# Altium PCB 主板-双BH(1).PcbDoc (part 4 of 13)
Units mm, origin at the board's own origin, x right, y up, seen from the top; angles counter-clockwise.
Board outline 97.69 x 103.45 mm, 2 copper layers (Top Layer, Bottom Layer); 78 components, 75 nets, 243 pads, 279 vias.
Unrouted connection lines stored in the file: 7.
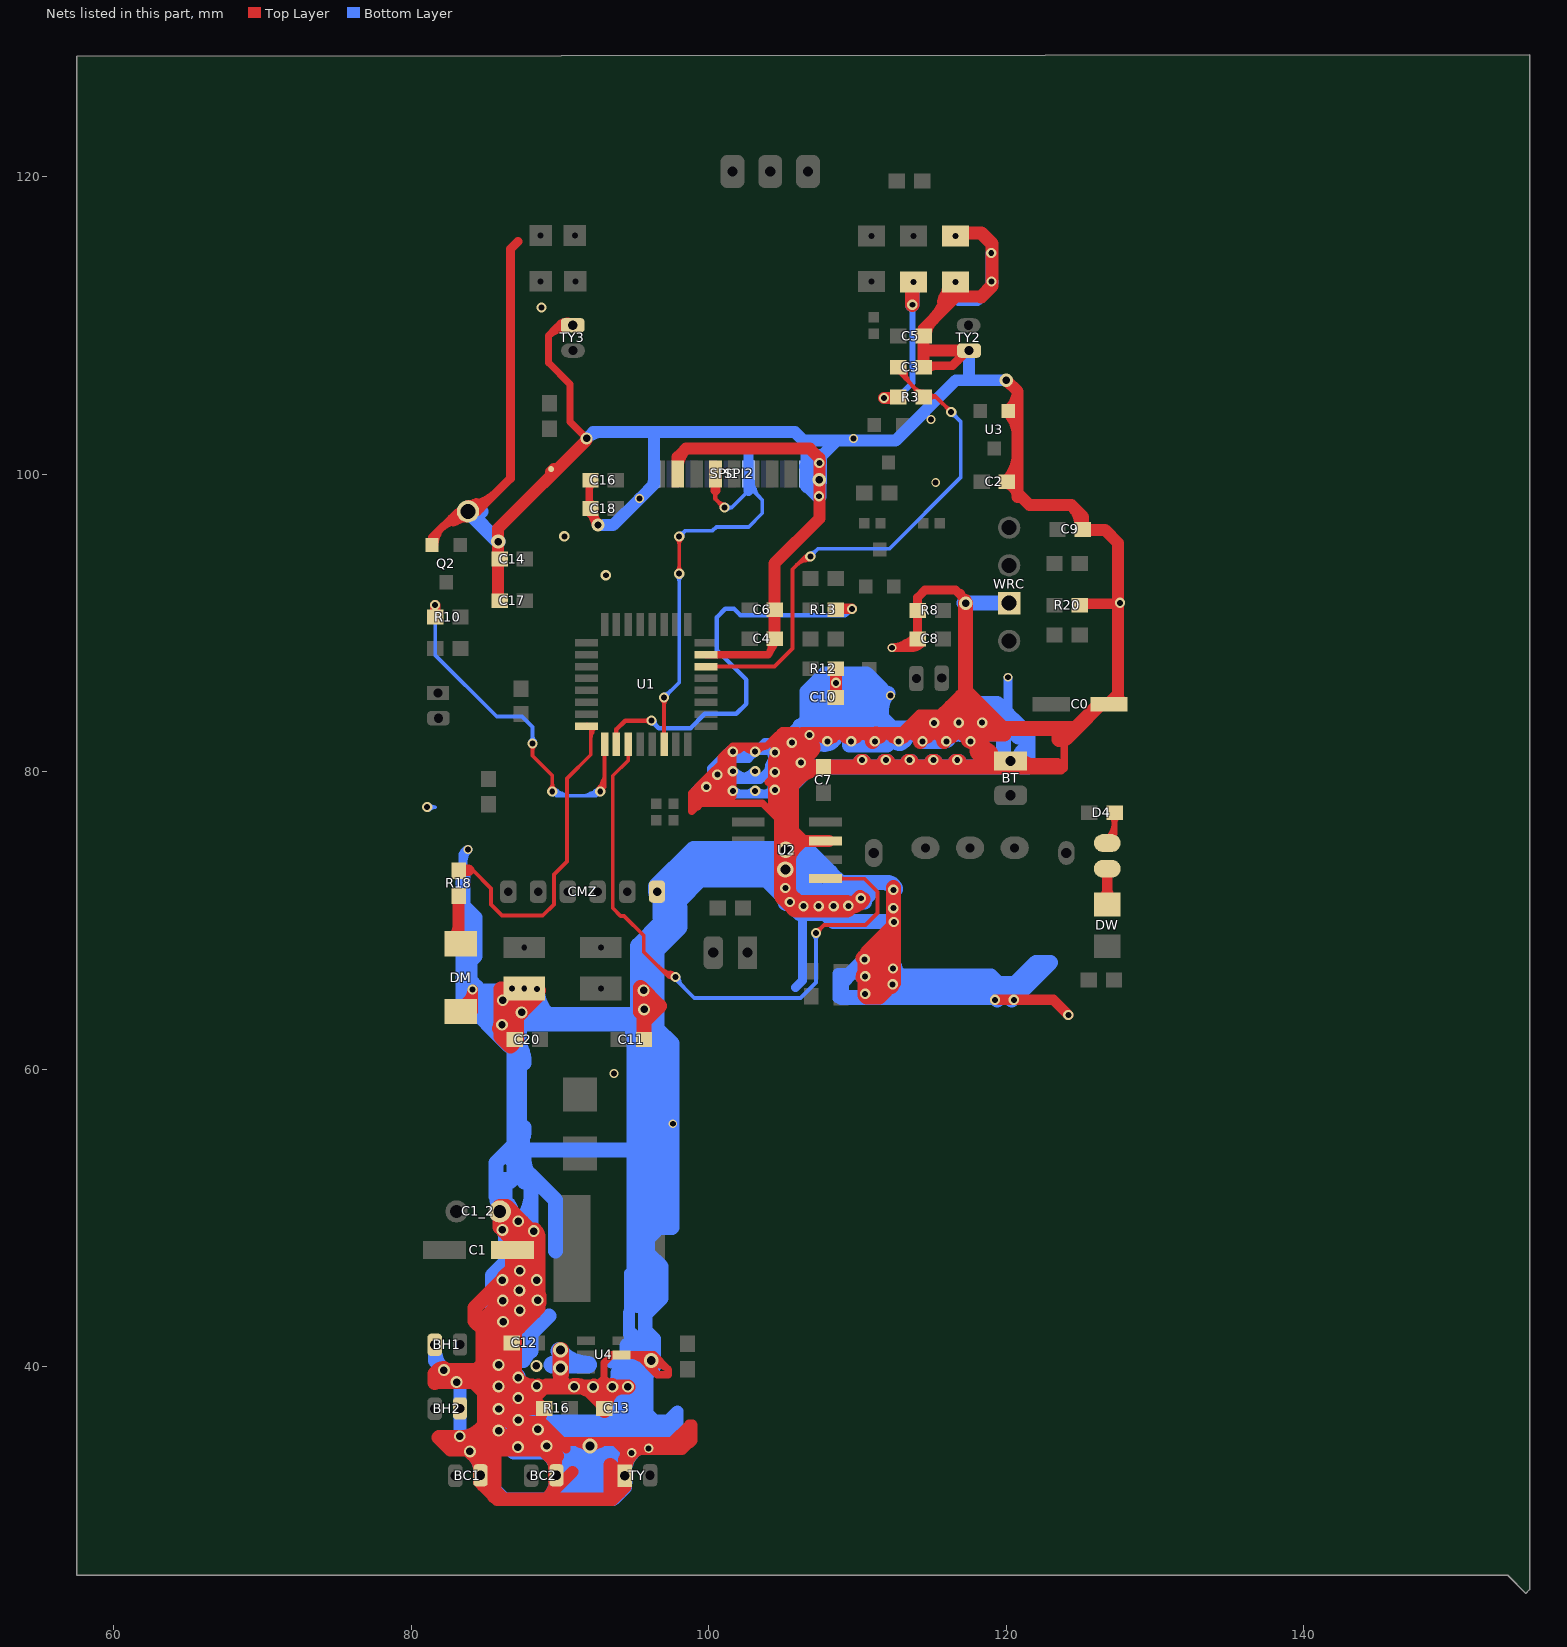
[diagram p4: the nets of this part, all layers, seen from the top]

## Via types
v1: diameter 0.7, hole 0.4, Top Layer to Bottom Layer, 108 vias
v2: diameter 0.68, hole 0.4, Top Layer to Bottom Layer, 87 vias
v3: diameter 0.8, hole 0.5, Top Layer to Bottom Layer, tented both sides, 33 vias
v4: diameter 0.6, hole 0.4, Top Layer to Bottom Layer, 12 vias
v5: diameter 0.9, hole 0.5, Top Layer to Bottom Layer, 8 vias
v6: diameter 0.8, hole 0.5, Top Layer to Bottom Layer, 6 vias
v7: diameter 1, hole 0.75, Top Layer to Bottom Layer, tented both sides, 5 vias
v8: diameter 3.4, hole 2.9, Top Layer to Bottom Layer, 4 vias
v9: diameter 1, hole 0.6, Top Layer to Bottom Layer, tented both sides, 3 vias
v10: diameter 1, hole 0.56, Top Layer to Bottom Layer, tented both sides, 2 vias
v11: diameter 1.1, hole 0.68, Top Layer to Bottom Layer, 2 vias
v12: diameter 0.8, hole 0.4, Top Layer to Bottom Layer, 2 vias
v13: diameter 0.65, hole 0.4, Top Layer to Bottom Layer, tented both sides, 2 vias
v14: diameter 1, hole 0.6, Top Layer to Bottom Layer, tented bottom, 1 vias
v15: diameter 0.7, hole 0.4, Top Layer to Bottom Layer, tented bottom, 1 vias
v16: diameter 0.95, hole 0.5, Top Layer to Bottom Layer, 1 vias
v17: diameter 0.64, hole 0.4, Top Layer to Bottom Layer, 1 vias
v18: diameter 0.62, hole 0.4, Top Layer to Bottom Layer, 1 vias

## Nets (pads, with @x,y where several pads share a name; then routed paths per layer and width w, separated by ;. In a path a pad name is that pad's centre, name@x,y a point inside that pad or via, vN(x,y) a via of type N, cw(c..) or ccw(c..) an arc to the next point about the centre after c; other vN are vias at no path point) (continued)
CSN: SPI1.5 SPI2.5 U1.30 | length 61.5
  Top Layer w0.254: U1.30@97,81.853 v2(97,84.988) ; v2(98.019,93.32) v2(98.019,95.809) ; v2@96.849,84.838 cw(c96.486,84.474) 97,84.474 ; v2@96.849,84.838 cw(c96.486,84.474) 97,84.474 ; v2@96.849,84.838 cw(c96.486,84.474) 97,84.474 ; U1.30@96.913,82.464 ccw(c96.703,82.674) 97,82.674 ; U1.30@96.913,82.464 ccw(c96.703,82.674) 97,82.674 ; U1.30@96.913,82.464 ccw(c96.703,82.674) 97,82.674 ; 97,82.674 ccw(c97.297,82.674) U1.30@97.087,82.464 ; 97,82.674 ccw(c97.297,82.674) U1.30@97.087,82.464 ; 97,82.674 ccw(c97.297,82.674) U1.30@97.087,82.464 ; 97,84.474 cw(c97.514,84.474) v2@97.151,84.838 ; 97,84.474 cw(c97.514,84.474) v2@97.151,84.838 ; 97,84.474 cw(c97.514,84.474) v2@97.151,84.838 ; v2@97.868,93.47 ccw(c97.504,93.834) 98.019,93.834 ; v2@97.868,93.47 ccw(c97.504,93.834) 98.019,93.834 ; v2@97.868,93.47 ccw(c97.504,93.834) 98.019,93.834 ; v2@97.868,95.658 cw(c97.504,95.295) 98.019,95.295 ; v2@97.868,95.658 cw(c97.504,95.295) 98.019,95.295 ; v2@97.868,95.658 cw(c97.504,95.295) 98.019,95.295 ; 98.019,93.834 ccw(c98.533,93.834) v2@98.169,93.47 ; 98.019,93.834 ccw(c98.533,93.834) v2@98.169,93.47 ; 98.019,93.834 ccw(c98.533,93.834) v2@98.169,93.47 ; 98.019,95.295 cw(c98.533,95.295) v2@98.169,95.658 ; 98.019,95.295 cw(c98.533,95.295) v2@98.169,95.658 ; 98.019,95.295 cw(c98.533,95.295) v2@98.169,95.658
  Top Layer w0.3: 100.457,98.933 100.457,98.349 v2@101.054,97.752 ; 100.699,98.107 ccw(c101.067,98.475) v2@101.067,97.955 ; 100.699,98.107 ccw(c101.067,98.475) v2@101.067,97.955 ; 100.699,98.107 ccw(c101.067,98.475) v2@101.067,97.955 ; 100.76,98.046 cw(c100.479,97.765) v2@100.877,97.765 ; 100.76,98.046 cw(c100.479,97.765) v2@100.877,97.765 ; 100.76,98.046 cw(c100.479,97.765) v2@100.877,97.765
  Top Layer w0.7: 100.457,98.933 SPI1.5@100.457,100.032
  Bottom Layer w0.254: v2(97,84.988) 98.019,86.007 v2(98.019,93.32) ; v2(98.019,95.809) 98.425,96.215 100.265,96.215 100.519,96.469 102.692,96.469 103.607,97.384 103.607,98.274 SPI2.5@102.68,99.2 ; v2(101.067,97.765) 101.549,97.765 ; 102.68,98.895 101.549,97.765 ; v2@97,85.201 ccw(c97,85.716) 97.364,85.352 ; v2@97,85.201 ccw(c97,85.716) 97.364,85.352 ; v2@97,85.201 ccw(c97,85.716) 97.364,85.352 ; v2@97.213,84.988 cw(c97.727,84.988) 97.364,85.352 ; v2@97.213,84.988 cw(c97.727,84.988) 97.364,85.352 ; v2@97.213,84.988 cw(c97.727,84.988) 97.364,85.352 ; v2@97.868,93.169 cw(c97.504,92.805) 98.019,92.805 ; v2@97.868,93.169 cw(c97.504,92.805) 98.019,92.805 ; v2@97.868,93.169 cw(c97.504,92.805) 98.019,92.805 ; 98.019,92.805 cw(c98.533,92.805) v2@98.169,93.169 ; 98.019,92.805 cw(c98.533,92.805) v2@98.169,93.169 ; 98.019,92.805 cw(c98.533,92.805) v2@98.169,93.169 ; v2@98.019,96.022 ccw(c98.019,96.536) 98.382,96.172 ; v2@98.019,96.022 ccw(c98.019,96.536) 98.382,96.172 ; v2@98.019,96.022 ccw(c98.019,96.536) 98.382,96.172 ; v2@98.232,95.809 cw(c98.746,95.809) 98.382,96.172 ; v2@98.232,95.809 cw(c98.746,95.809) 98.382,96.172 ; v2@98.232,95.809 cw(c98.746,95.809) 98.382,96.172 ; v2@101.224,97.621 cw(c101.549,97.324) 101.549,97.765 ; v2@101.224,97.621 cw(c101.549,97.324) 101.549,97.765 ; v2@101.224,97.621 cw(c101.549,97.324) 101.549,97.765 ; v2@101.224,97.908 ccw(c101.549,98.205) 101.549,97.765 ; v2@101.224,97.908 ccw(c101.549,98.205) 101.549,97.765 ; v2@101.224,97.908 ccw(c101.549,98.205) 101.549,97.765 ; SPI2.5@102.605,99.268 cw(c102.51,98.905) 102.873,99.002 ; SPI2.5@102.605,99.268 cw(c102.51,98.905) 102.873,99.002 ; SPI2.5@102.605,99.268 cw(c102.51,98.905) 102.873,99.002 ; SPI2.5@102.658,99.518 cw(c102.138,98.594) 103.162,98.869 ; SPI2.5@102.658,99.518 cw(c102.138,98.594) 103.162,98.869 ; SPI2.5@102.658,99.518 cw(c102.138,98.594) 103.162,98.869 ; SPI2.5@102.724,99.557 ccw(c103.691,99.557) 103.007,98.873 ; SPI2.5@102.724,99.557 ccw(c103.691,99.557) 103.007,98.873 ; SPI2.5@102.724,99.557 ccw(c103.691,99.557) 103.007,98.873 ; 102.873,99.002 cw(c103.356,99.132) SPI2.5@102.932,99.398 ; 102.873,99.002 cw(c103.356,99.132) SPI2.5@102.932,99.398 ; 102.873,99.002 cw(c103.356,99.132) SPI2.5@102.932,99.398 ; SPI2.5@102.978,99.557 ccw(c104.558,99.557) 103.441,98.439 ; SPI2.5@102.978,99.557 ccw(c104.558,99.557) 103.441,98.439 ; SPI2.5@102.978,99.557 ccw(c104.558,99.557) 103.441,98.439
  Bottom Layer w0.7: 102.68,98.895 102.68,101.752
DCJC: R13.2 U1.26 | length 36.1
  Top Layer w0.3: U1.26@93.8,81.853 93.8,82.853 94.386,83.439 v2(96.164,83.439) ; R13.2@108.55,90.9 R13.2@108.607,90.957 ; 95.706,83.439 ccw(c95.706,83.898) v2@96.03,83.573 ; 95.706,83.439 cw(c95.706,82.98) v2@96.03,83.305 ; 95.706,83.439 ccw(c95.706,83.898) v2@96.03,83.573 ; 95.706,83.439 cw(c95.706,82.98) v2@96.03,83.305 ; 95.706,83.439 ccw(c95.706,83.898) v2@96.03,83.573 ; 95.706,83.439 cw(c95.706,82.98) v2@96.03,83.305
  Top Layer w0.7: R13.2@108.607,90.957 v2(109.626,90.957) ; R13.2@108.706,90.794 cw(c109.101,90.399) 109.101,90.957 ; R13.2@108.706,90.794 cw(c109.101,90.399) 109.101,90.957 ; R13.2@108.706,90.794 cw(c109.101,90.399) 109.101,90.957
  Bottom Layer w0.3: v2@96.152,83.426 96.647,82.931 98.781,82.931 99.746,83.896 101.854,83.896 102.54,84.582 102.54,86.182 100.556,88.166 100.556,90.396 101.117,90.957 101.702,90.957 102.138,90.521 109.19,90.521 v2(109.626,90.957) ; v2@96.164,83.249 cw(c96.164,82.852) 96.445,83.133 ; v2@96.164,83.249 cw(c96.164,82.852) 96.445,83.133 ; v2@96.164,83.249 cw(c96.164,82.852) 96.445,83.133 ; v2@96.354,83.439 ccw(c96.874,83.439) 96.507,83.071 ; v2@96.354,83.439 ccw(c96.874,83.439) 96.507,83.071 ; v2@96.354,83.439 ccw(c96.874,83.439) 96.507,83.071 ; 109.302,90.633 ccw(c108.978,90.957) v2@109.436,90.957 ; 109.302,90.633 cw(c109.626,90.309) v2@109.626,90.767 ; 109.302,90.633 ccw(c108.978,90.957) v2@109.436,90.957 ; 109.302,90.633 cw(c109.626,90.309) v2@109.626,90.767 ; 109.302,90.633 ccw(c108.978,90.957) v2@109.436,90.957 ; 109.302,90.633 cw(c109.626,90.309) v2@109.626,90.767
DM: R18.2 U1.24 | length 27.4
  Top Layer w0.254: 83.931,73.381 84.15,73.381 85.369,72.161 85.369,71.069 86.106,70.333 88.849,70.333 89.599,71.082 89.599,73.089 90.475,73.965 90.475,79.553 92.075,81.153 92.075,83.033 U1.24@91.669,83.033 ; U1.24@91.804,83.202 U1.24@91.973,83.033 ; 92.211,82.75 cw(c92.417,82.769) U1.24@92.344,82.963 ; 92.075,82.237 cw(c93.141,82.237) U1.24@92.387,82.991 ; 92.075,82.237 cw(c93.141,82.237) U1.24@92.387,82.991 ; 92.075,82.237 cw(c93.141,82.237) U1.24@92.387,82.991 ; U1.24@92.075,82.85 cw(c92.527,82.85) U1.24@92.207,83.17 ; U1.24@92.075,82.85 cw(c92.527,82.85) U1.24@92.207,83.17 ; U1.24@92.075,82.85 cw(c92.527,82.85) U1.24@92.207,83.17 ; 92.146,82.572 ccw(c91.673,82.845) U1.24@92.185,83.035 ; 92.146,82.572 ccw(c91.673,82.845) U1.24@92.185,83.035 ; 92.146,82.572 ccw(c91.673,82.845) U1.24@92.185,83.035
  Top Layer w0.8: R18.2@83.214,73.381 83.863,73.381
DMD: DM.2 R18.1 | length 8.6
  Top Layer w0.254: 83.134,70.632 83.2,70.95
  Top Layer w0.8: DM.2@83.188,68.508 R18.1@83.188,71.65 ; DM.2@82.772,68.75 ccw(c81.768,69.754) 83.188,69.754 ; DM.2@82.772,68.75 ccw(c81.768,69.754) 83.188,69.754 ; DM.2@82.772,68.75 ccw(c81.768,69.754) 83.188,69.754 ; 83.188,69.283 ccw(c83.941,69.283) DM.2@83.408,68.75 ; 83.188,69.283 ccw(c83.941,69.283) DM.2@83.408,68.75 ; 83.188,69.283 ccw(c83.941,69.283) DM.2@83.408,68.75
DMLED: 
DW: D4.1 pad.4@126.8,75.209 | length 10.8
  Top Layer w0.4: pad.4@126.6,75.209 127.291,75.901 ; D4.1@127.291,77.25 127.291,75.901 ; pad.4@126.817,75.492 ccw(c125.673,76.637) 127.291,76.637 ; pad.4@126.817,75.492 ccw(c125.673,76.637) 127.291,76.637 ; pad.4@126.817,75.492 ccw(c125.673,76.637) 127.291,76.637 ; pad.4@127.038,75.605 ccw(c126.992,75.901) 127.291,75.901 ; pad.4@127.038,75.605 ccw(c126.992,75.901) 127.291,75.901 ; pad.4@127.038,75.605 ccw(c126.992,75.901) 127.291,75.901 ; D4.1@127.079,77.038 cw(c126.567,76.526) 127.291,76.526 ; D4.1@127.079,77.038 cw(c126.567,76.526) 127.291,76.526 ; D4.1@127.079,77.038 cw(c126.567,76.526) 127.291,76.526 ; 127.291,76.526 cw(c128.015,76.526) D4.1@127.503,77.038 ; 127.291,76.526 cw(c128.015,76.526) D4.1@127.503,77.038 ; 127.291,76.526 cw(c128.015,76.526) D4.1@127.503,77.038
DW+: DW.1 pad.4@126.8,73.482 | length 10.3
  Top Layer w0.7: DW.1@126.8,71.148 pad.4@126.8,73.482 ; DW.1@126.482,71.39 ccw(c125.714,72.159) 126.8,72.159 ; DW.1@126.482,71.39 ccw(c125.714,72.159) 126.8,72.159 ; DW.1@126.482,71.39 ccw(c125.714,72.159) 126.8,72.159 ; pad.4@126.623,73.305 cw(c126.196,72.879) 126.8,72.879 ; pad.4@126.623,73.305 cw(c126.196,72.879) 126.8,72.879 ; pad.4@126.623,73.305 cw(c126.196,72.879) 126.8,72.879 ; 126.8,72.159 ccw(c127.886,72.159) DW.1@127.118,71.39 ; 126.8,72.159 ccw(c127.886,72.159) DW.1@127.118,71.39 ; 126.8,72.159 ccw(c127.886,72.159) DW.1@127.118,71.39 ; 126.8,72.879 cw(c127.404,72.879) pad.4@126.977,73.305 ; 126.8,72.879 cw(c127.404,72.879) pad.4@126.977,73.305 ; 126.8,72.879 cw(c127.404,72.879) pad.4@126.977,73.305
FI-R: U1.27 U2.1 | length 68.5
  Top Layer w0.254: U1.27@94.6,81.853 94.6,80.782 93.548,79.731 93.548,70.841 94.082,70.307 94.317,70.307 95.631,68.994 95.631,67.894 97.307,66.218 ; 97.135,66.557 ccw(c97.528,66.95) v2@97.699,66.421 ; v2(97.765,66.218) 97.307,66.218 ; v2(107.213,69.164) 107.747,69.698 110.541,69.698 111.354,70.51 111.354,71.933 110.469,72.817 U2.1@108.154,72.817 ; U1.27@94.513,81.241 cw(c94.303,81.031) 94.6,81.031 ; U1.27@94.513,81.241 cw(c94.303,81.031) 94.6,81.031 ; U1.27@94.513,81.241 cw(c94.303,81.031) 94.6,81.031 ; 94.6,81.031 cw(c94.897,81.031) U1.27@94.687,81.241 ; 94.6,81.031 cw(c94.897,81.031) U1.27@94.687,81.241 ; 94.6,81.031 cw(c94.897,81.031) U1.27@94.687,81.241 ; 96.62,66.905 ccw(c97.765,68.049) v2@97.765,66.431 ; 96.62,66.905 ccw(c97.765,68.049) v2@97.765,66.431 ; 96.62,66.905 ccw(c97.765,68.049) v2@97.765,66.431 ; 96.841,66.678 cw(c96.526,65.503) v2@97.58,66.111 ; 96.841,66.678 cw(c96.526,65.503) v2@97.58,66.111 ; 96.841,66.678 cw(c96.526,65.503) v2@97.58,66.111 ; 97.054,66.471 ccw(c97.765,67.182) v2@97.765,66.177 ; 97.054,66.471 ccw(c97.765,67.182) v2@97.765,66.177 ; 97.054,66.471 ccw(c97.765,67.182) v2@97.765,66.177 ; 97.307,66.218 ccw(c97.307,66.602) v2@97.602,66.355 ; 97.307,66.218 cw(c97.307,65.834) v2@97.602,66.081 ; 97.307,66.218 ccw(c97.307,66.602) v2@97.602,66.355 ; 97.307,66.218 cw(c97.307,65.834) v2@97.602,66.081 ; 97.307,66.218 ccw(c97.307,66.602) v2@97.602,66.355 ; 97.307,66.218 cw(c97.307,65.834) v2@97.602,66.081 ; 97.328,66.294 ccw(c97.406,66.582) v2@97.615,66.369 ; 97.328,66.294 ccw(c97.406,66.582) v2@97.615,66.369 ; 97.328,66.294 ccw(c97.406,66.582) v2@97.615,66.369 ; 97.35,66.288 cw(c97.252,65.922) v2@97.58,66.111 ; 97.35,66.288 cw(c97.252,65.922) v2@97.58,66.111 ; 97.35,66.288 cw(c97.252,65.922) v2@97.58,66.111 ; 97.434,66.519 cw(c97.277,65.937) v2@97.8,66.238 ; 97.434,66.519 cw(c97.277,65.937) v2@97.8,66.238 ; 97.434,66.519 cw(c97.277,65.937) v2@97.8,66.238 ; v2@107.213,69.377 ccw(c107.213,69.891) 107.577,69.528 ; v2@107.213,69.377 ccw(c107.213,69.891) 107.577,69.528 ; v2@107.213,69.377 ccw(c107.213,69.891) 107.577,69.528 ; v2@107.426,69.164 cw(c107.941,69.164) 107.577,69.528 ; v2@107.426,69.164 cw(c107.941,69.164) 107.577,69.528 ; v2@107.426,69.164 cw(c107.941,69.164) 107.577,69.528 ; U2.1@108.776,72.695 cw(c109.072,72.399) 109.072,72.817 ; U2.1@108.776,72.695 cw(c109.072,72.399) 109.072,72.817 ; U2.1@108.776,72.695 cw(c109.072,72.399) 109.072,72.817 ; U2.1@108.776,72.939 ccw(c109.072,73.235) 109.072,72.817 ; U2.1@108.776,72.939 ccw(c109.072,73.235) 109.072,72.817 ; U2.1@108.776,72.939 ccw(c109.072,73.235) 109.072,72.817
  Bottom Layer w0.254: v2@97.663,66.37 97.663,66.167 99.031,64.799 106.176,64.799 107.213,65.837 v2(107.213,69.164) ; v2@97.781,66.255 cw(c97.591,65.818) 98.052,65.941 ; v2@97.781,66.255 cw(c97.591,65.818) 98.052,65.941 ; v2@97.781,66.255 cw(c97.591,65.818) 98.052,65.941 ; v2@97.978,66.218 ccw(c98.86,66.218) 98.236,65.594 ; v2@97.978,66.218 ccw(c98.86,66.218) 98.236,65.594 ; v2@97.978,66.218 ccw(c98.86,66.218) 98.236,65.594 ; v2@107.063,69.014 cw(c106.699,68.65) 107.213,68.65 ; v2@107.063,69.014 cw(c106.699,68.65) 107.213,68.65 ; v2@107.063,69.014 cw(c106.699,68.65) 107.213,68.65 ; 107.213,68.65 cw(c107.728,68.65) v2@107.364,69.014 ; 107.213,68.65 cw(c107.728,68.65) v2@107.364,69.014 ; 107.213,68.65 cw(c107.728,68.65) v2@107.364,69.014
FL: pad.0@113.78,112.932 R3.2 | length 15.6
  Top Layer w0.254: pad.0@113.65,112.822 113.538,112.822 113.538,112.932 pad.0@113.75,112.932
  Top Layer w0.6: pad.0@113.65,112.822 pad.0@113.69,112.862
  Top Layer w0.8: v2(111.785,105.131) R3.2@112.677,105.131
  Top Layer w1: v2(113.69,111.404) pad.0@113.69,112.862 ; pad.0@113.69,112.233 cw(c114.479,112.233) pad.0@113.921,112.79 ; pad.0@113.69,112.233 cw(c114.479,112.233) pad.0@113.921,112.79 ; pad.0@113.69,112.233 cw(c114.479,112.233) pad.0@113.921,112.79
  Bottom Layer w0.4: v2(111.785,105.131) 112.674,105.131 113.69,106.147 v2(113.69,111.404)
  Bottom Layer w1: v2(113.69,111.404) pad.0@113.69,112.862 ; pad.0@113.69,112.233 cw(c114.479,112.233) pad.0@113.921,112.79 ; pad.0@113.69,112.233 cw(c114.479,112.233) pad.0@113.921,112.79 ; pad.0@113.69,112.233 cw(c114.479,112.233) pad.0@113.921,112.79
FL-U: C3.2 R3.1 U1.6 | length 77.1
  Top Layer w0.254: U1.6@99.825,87.077 104.426,87.077 105.639,88.29 105.639,93.624 106.502,94.488 v2(106.832,94.488) ; C3.2@112.522,106.985 C3.2@112.831,106.985 ; C3.2@112.825,106.828 cw(c112.86,106.321) C3.2@113.194,106.704 ; C3.2@112.959,106.7 114.45,105.209 R3.1@114.45,105.105 ; C3.2@113.15,107.071 ccw(c113.512,106.938) 113.259,106.647 ; R3.1@114.198,105.283 115.214,105.283 ; R3.1@114.579,105.207 115.291,105.207 ; v2(116.307,104.191) 115.291,105.207 ; U1.6@100.437,86.991 cw(c100.647,86.781) 100.647,87.077 ; U1.6@100.437,86.991 cw(c100.647,86.781) 100.647,87.077 ; U1.6@100.437,86.991 cw(c100.647,86.781) 100.647,87.077 ; U1.6@100.437,87.164 ccw(c100.647,87.374) 100.647,87.077 ; U1.6@100.437,87.164 ccw(c100.647,87.374) 100.647,87.077 ; U1.6@100.437,87.164 ccw(c100.647,87.374) 100.647,87.077 ; 105.905,93.891 cw(c106.832,92.964) v2@106.832,94.275 ; 105.905,93.891 cw(c106.832,92.964) v2@106.832,94.275 ; 105.905,93.891 cw(c106.832,92.964) v2@106.832,94.275 ; 106.339,94.325 cw(c106.832,93.831) v2@106.832,94.529 ; 106.339,94.325 cw(c106.832,93.831) v2@106.832,94.529 ; 106.339,94.325 cw(c106.832,93.831) v2@106.832,94.529 ; 106.501,94.186 ccw(c106.345,94.769) v2@106.868,94.468 ; 106.501,94.186 ccw(c106.345,94.769) v2@106.868,94.468 ; 106.501,94.186 ccw(c106.345,94.769) v2@106.868,94.468 ; C3.2@112.748,107.093 cw(c112.185,105.944) 113.421,106.275 ; C3.2@112.748,107.093 cw(c112.185,105.944) 113.421,106.275 ; C3.2@112.748,107.093 cw(c112.185,105.944) 113.421,106.275 ; C3.2@112.859,107.321 cw(c112.511,106.61) C3.2@113.276,106.815 ; C3.2@112.859,107.321 cw(c112.511,106.61) C3.2@113.276,106.815 ; C3.2@112.859,107.321 cw(c112.511,106.61) C3.2@113.276,106.815 ; C3.2@112.919,107.2 ccw(c114.029,107.2) 113.244,106.415 ; C3.2@112.919,107.2 ccw(c114.029,107.2) 113.244,106.415 ; C3.2@112.919,107.2 ccw(c114.029,107.2) 113.244,106.415 ; 113.072,106.628 cw(c113.563,106.759) C3.2@113.123,107.014 ; 113.072,106.628 cw(c113.563,106.759) C3.2@113.123,107.014 ; 113.072,106.628 cw(c113.563,106.759) C3.2@113.123,107.014 ; C3.2@113.173,107.2 ccw(c114.896,107.2) 113.678,105.981 ; C3.2@113.173,107.2 ccw(c114.896,107.2) 113.678,105.981 ; C3.2@113.173,107.2 ccw(c114.896,107.2) 113.678,105.981 ; 113.721,105.938 cw(c112.984,105.2) R3.1@114.027,105.2 ; 113.721,105.938 cw(c112.984,105.2) R3.1@114.027,105.2 ; 113.721,105.938 cw(c112.984,105.2) R3.1@114.027,105.2 ; 113.864,105.795 ccw(c114.4,106.331) R3.1@114.4,105.573 ; 113.864,105.795 ccw(c114.4,106.331) R3.1@114.4,105.573 ; 113.864,105.795 ccw(c114.4,106.331) R3.1@114.4,105.573 ; R3.1@113.952,105.481 ccw(c114.512,105.631) R3.1@114.366,105.069 ; R3.1@113.952,105.481 ccw(c114.512,105.631) R3.1@114.366,105.069 ; R3.1@113.952,105.481 ccw(c114.512,105.631) R3.1@114.366,105.069 ; R3.1@114.764,105.464 ccw(c115.2,105.9) 115.2,105.283 ; R3.1@114.764,105.464 ccw(c115.2,105.9) 115.2,105.283 ; R3.1@114.764,105.464 ccw(c115.2,105.9) 115.2,105.283 ; R3.1@114.784,105.441 ccw(c115.291,105.87) 115.291,105.207 ; R3.1@114.784,105.441 ccw(c115.291,105.87) 115.291,105.207 ; R3.1@114.784,105.441 ccw(c115.291,105.87) 115.291,105.207 ; R3.1@114.791,104.967 cw(c115.291,104.567) 115.291,105.207 ; R3.1@114.791,104.967 cw(c115.291,104.567) 115.291,105.207 ; R3.1@114.791,104.967 cw(c115.291,104.567) 115.291,105.207 ; R3.1@114.838,105.043 cw(c115.214,104.868) 115.214,105.283 ; R3.1@114.838,105.043 cw(c115.214,104.868) 115.214,105.283 ; R3.1@114.838,105.043 cw(c115.214,104.868) 115.214,105.283 ; 115.943,104.554 ccw(c116.307,104.918) v2@116.307,104.404 ; 115.943,104.554 cw(c115.579,104.191) v2@116.094,104.191 ; 115.943,104.554 ccw(c116.307,104.918) v2@116.307,104.404 ; 115.943,104.554 cw(c115.579,104.191) v2@116.094,104.191 ; 115.943,104.554 ccw(c116.307,104.918) v2@116.307,104.404 ; 115.943,104.554 cw(c115.579,104.191) v2@116.094,104.191
  Bottom Layer w0.254: v2(106.832,94.488) 107.34,94.996 112.15,94.996 116.942,99.787 116.942,103.556 v2(116.307,104.191) ; v2@106.832,94.701 ccw(c106.832,95.215) 107.196,94.852 ; v2@106.832,94.701 ccw(c106.832,95.215) 107.196,94.852 ; v2@106.832,94.701 ccw(c106.832,95.215) 107.196,94.852 ; v2@107.045,94.488 cw(c107.56,94.488) 107.196,94.852 ; v2@107.045,94.488 cw(c107.56,94.488) 107.196,94.852 ; v2@107.045,94.488 cw(c107.56,94.488) 107.196,94.852 ; v2@116.307,103.978 cw(c116.307,103.464) 116.67,103.827 ; v2@116.307,103.978 cw(c116.307,103.464) 116.67,103.827 ; v2@116.307,103.978 cw(c116.307,103.464) 116.67,103.827 ; v2@116.52,104.191 ccw(c117.034,104.191) 116.67,103.827 ; v2@116.52,104.191 ccw(c117.034,104.191) 116.67,103.827 ; v2@116.52,104.191 ccw(c117.034,104.191) 116.67,103.827
FM: R10.2 U1.25 | length 94.1
  Top Layer w0.254: R10.2@81.32,90.686 ccw(c81.054,91.003) 81.468,91.003 ccw(c81.718,91.003) R10.2@81.655,90.761 ; R10.2@81.566,90.761 ccw(c81.502,91.003) 81.752,91.003 ccw(c82.167,91.003) R10.2@81.9,90.685 ; R10.2@81.61,90.46 v2(81.61,91.211) ; v2(88.163,81.915) 88.163,81.077 89.484,79.756 v2(89.484,78.689) ; v2(92.71,78.689) 93,78.979 ; U1.25@93,81.853 93,78.979 ; R10.2@81.367,90.683 ccw(c80.915,91.211) v2(81.61,91.211) ; R10.2@81.367,90.683 ccw(c80.915,91.211) v2(81.61,91.211) ; R10.2@81.367,90.683 ccw(c80.915,91.211) v2(81.61,91.211) ; R10.2@81.376,90.725 ccw(c81.24,90.966) v2@81.517,90.966 ; R10.2@81.376,90.725 ccw(c81.24,90.966) v2@81.517,90.966 ; R10.2@81.376,90.725 ccw(c81.24,90.966) v2@81.517,90.966 ; R10.2@81.376,90.725 ccw(c81.24,90.966) v2@81.517,90.966 ; v2@81.426,91.105 cw(c81.059,90.893) R10.2@81.468,90.783 ; v2@81.426,91.105 cw(c81.059,90.893) R10.2@81.468,90.783 ; v2@81.426,91.105 cw(c81.059,90.893) R10.2@81.468,90.783 ; v2@81.426,91.105 cw(c81.059,90.893) R10.2@81.468,90.783 ; v2@81.426,91.105 cw(c81.059,90.893) R10.2@81.468,90.783 ; v2@81.46,91.061 cw(c81.096,90.697) R10.2@81.61,90.697 ; v2@81.46,91.061 cw(c81.096,90.697) R10.2@81.61,90.697 ; v2@81.46,91.061 cw(c81.096,90.697) R10.2@81.61,90.697 ; v2@81.463,91.058 cw(c81.326,90.915) R10.2@81.517,90.864 ; v2@81.463,91.058 cw(c81.326,90.915) R10.2@81.517,90.864 ; v2@81.463,91.058 cw(c81.326,90.915) R10.2@81.517,90.864 ; v2@81.463,91.058 cw(c81.326,90.915) R10.2@81.517,90.864 ; v2@81.463,91.058 cw(c81.326,90.915) R10.2@81.517,90.864 ; v2@81.463,91.058 cw(c81.326,90.915) R10.2@81.517,90.864 ; R10.2@81.468,90.783 cw(c81.787,90.697) v2@81.68,91.01 ; R10.2@81.468,90.783 cw(c81.787,90.697) v2@81.68,91.01 ; R10.2@81.468,90.783 cw(c81.787,90.697) v2@81.68,91.01 ; R10.2@81.468,90.783 cw(c81.787,90.697) v2@81.68,91.01 ; R10.2@81.468,90.783 cw(c81.787,90.697) v2@81.68,91.01 ; R10.2@81.517,90.864 cw(c81.708,90.812) v2@81.661,91.005 ; R10.2@81.517,90.864 cw(c81.708,90.812) v2@81.661,91.005 ; R10.2@81.517,90.864 cw(c81.708,90.812) v2@81.661,91.005 ; R10.2@81.517,90.864 cw(c81.708,90.812) v2@81.661,91.005 ; R10.2@81.517,90.864 cw(c81.708,90.812) v2@81.661,91.005 ; R10.2@81.517,90.864 cw(c81.708,90.812) v2@81.661,91.005 ; v2@81.517,90.966 ccw(c81.737,90.966) R10.2@81.671,90.756 ; v2@81.517,90.966 ccw(c81.737,90.966) R10.2@81.671,90.756 ; v2@81.517,90.966 ccw(c81.737,90.966) R10.2@81.671,90.756 ; v2@81.517,90.966 ccw(c81.737,90.966) R10.2@81.671,90.756 ; v2@81.541,91.01 cw(c81.433,90.697) R10.2@81.753,90.783 ; v2@81.541,91.01 cw(c81.433,90.697) R10.2@81.753,90.783 ; v2@81.541,91.01 cw(c81.433,90.697) R10.2@81.753,90.783 ; v2@81.541,91.01 cw(c81.433,90.697) R10.2@81.753,90.783 ; v2@81.541,91.01 cw(c81.433,90.697) R10.2@81.753,90.783 ; R10.2@81.549,90.756 ccw(c81.484,90.966) v2@81.703,90.966 ; R10.2@81.549,90.756 ccw(c81.484,90.966) v2@81.703,90.966 ; R10.2@81.549,90.756 ccw(c81.484,90.966) v2@81.703,90.966 ; R10.2@81.549,90.756 ccw(c81.484,90.966) v2@81.703,90.966 ; v2@81.559,91.005 cw(c81.512,90.812) R10.2@81.703,90.863 ; v2@81.559,91.005 cw(c81.512,90.812) R10.2@81.703,90.863 ; v2@81.559,91.005 cw(c81.512,90.812) R10.2@81.703,90.863 ; v2@81.559,91.005 cw(c81.512,90.812) R10.2@81.703,90.863 ; v2@81.559,91.005 cw(c81.512,90.812) R10.2@81.703,90.863 ; v2@81.559,91.005 cw(c81.512,90.812) R10.2@81.703,90.863 ; R10.2@81.61,90.697 cw(c82.124,90.697) v2@81.761,91.061 ; R10.2@81.61,90.697 cw(c82.124,90.697) v2@81.761,91.061 ; R10.2@81.61,90.697 cw(c82.124,90.697) v2@81.761,91.061 ; v2(81.61,91.211) ccw(c82.306,91.211) R10.2@81.853,90.683 ; v2(81.61,91.211) ccw(c82.306,91.211) R10.2@81.853,90.683 ; v2(81.61,91.211) ccw(c82.306,91.211) R10.2@81.853,90.683 ; R10.2@81.703,90.863 cw(c81.895,90.915) v2@81.758,91.058 ; R10.2@81.703,90.863 cw(c81.895,90.915) v2@81.758,91.058 ; R10.2@81.703,90.863 cw(c81.895,90.915) v2@81.758,91.058 ; R10.2@81.703,90.863 cw(c81.895,90.915) v2@81.758,91.058 ; R10.2@81.703,90.863 cw(c81.895,90.915) v2@81.758,91.058 ; R10.2@81.703,90.863 cw(c81.895,90.915) v2@81.758,91.058 ; v2@81.703,90.966 ccw(c81.981,90.966) R10.2@81.844,90.724 ; v2@81.703,90.966 ccw(c81.981,90.966) R10.2@81.844,90.724 ; v2@81.703,90.966 ccw(c81.981,90.966) R10.2@81.844,90.724 ; v2@81.703,90.966 ccw(c81.981,90.966) R10.2@81.844,90.724 ; R10.2@81.752,90.784 cw(c82.161,90.893) v2@81.795,91.105 ; R10.2@81.752,90.784 cw(c82.161,90.893) v2@81.795,91.105 ; R10.2@81.752,90.784 cw(c82.161,90.893) v2@81.795,91.105 ; R10.2@81.752,90.784 cw(c82.161,90.893) v2@81.795,91.105 ; R10.2@81.752,90.784 cw(c82.161,90.893) v2@81.795,91.105 ; 88.163,81.401 ccw(c87.649,81.401) 88.013,81.764 cw(c87.649,81.401) 88.163,81.401 ; 88.163,81.401 cw(c88.678,81.401) 88.314,81.764 ccw(c88.678,81.401) 88.163,81.401 ; v2@89.334,78.84 ccw(c88.97,79.203) 89.484,79.203 ; v2@89.334,78.84 ccw(c88.97,79.203) 89.484,79.203 ; v2@89.334,78.84 ccw(c88.97,79.203) 89.484,79.203 ; 89.484,79.203 ccw(c89.998,79.203) v2@89.635,78.84 ; 89.484,79.203 ccw(c89.998,79.203) v2@89.635,78.84 ; 89.484,79.203 ccw(c89.998,79.203) v2@89.635,78.84 ; v2@92.559,78.84 ccw(c91.495,79.904) 93,79.904 ; v2@92.559,78.84 ccw(c91.495,79.904) 93,79.904 ; v2@92.559,78.84 ccw(c91.495,79.904) 93,79.904 ; 92.673,79.036 ccw(c92.987,78.854) v2@92.675,78.668 ; 92.673,79.036 ccw(c92.987,78.854) v2@92.675,78.668 ; 92.673,79.036 ccw(c92.987,78.854) v2@92.675,78.668 ; v2@92.696,78.902 ccw(c92.672,79.258) 92.981,79.08 ; v2@92.696,78.902 ccw(c92.672,79.258) 92.981,79.08 ; v2@92.696,78.902 ccw(c92.672,79.258) 92.981,79.08 ; v2@92.739,78.66 ccw(c92.109,79.291) 93,79.291 ; v2@92.739,78.66 ccw(c92.109,79.291) 93,79.291 ; v2@92.739,78.66 ccw(c92.109,79.291) 93,79.291 ; v2@92.747,78.899 ccw(c92.796,79.183) 93,78.979 ; v2@92.747,78.899 ccw(c92.796,79.183) 93,78.979 ; v2@92.747,78.899 ccw(c92.796,79.183) 93,78.979 ; 92.889,79.411 ccw(c93.415,79.108) v2@92.893,78.798 ; 92.889,79.411 ccw(c93.415,79.108) v2@92.893,78.798 ; 92.889,79.411 ccw(c93.415,79.108) v2@92.893,78.798 ; U1.25@92.913,81.241 cw(c92.703,81.031) 93,81.031 ; U1.25@92.913,81.241 cw(c92.703,81.031) 93,81.031 ; U1.25@92.913,81.241 cw(c92.703,81.031) 93,81.031 ; v2@92.916,78.744 cw(c93.282,78.842) 92.954,79.032 ; v2@92.916,78.744 cw(c93.282,78.842) 92.954,79.032 ; v2@92.916,78.744 cw(c93.282,78.842) 92.954,79.032 ; v2@92.92,78.726 cw(c93.204,78.775) 93,78.979 ; v2@92.92,78.726 cw(c93.204,78.775) 93,78.979 ; v2@92.92,78.726 cw(c93.204,78.775) 93,78.979 ; 93,81.031 cw(c93.297,81.031) U1.25@93.087,81.241 ; 93,81.031 cw(c93.297,81.031) U1.25@93.087,81.241 ; 93,81.031 cw(c93.297,81.031) U1.25@93.087,81.241
  Top Layer w0.7: R10.2@81.61,90.3 v2(81.61,91.211)
  Bottom Layer w0.254: v2@81.636,91.211 81.636,91.389 81.61,91.415 v2(81.61,91.211) 81.61,87.859 85.75,83.718 87.452,83.718 88.163,83.007 v2(88.163,81.915) ; v2(89.484,78.689) 89.789,78.384 92.405,78.384 v2(92.71,78.689) ; v2@81.46,91.061 cw(c81.096,90.697) 81.61,90.697 ; v2@81.46,91.061 cw(c81.096,90.697) 81.61,90.697 ; v2@81.46,91.061 cw(c81.096,90.697) 81.61,90.697 ; 81.61,90.697 cw(c82.124,90.697) v2@81.761,91.061 ; 81.61,90.697 cw(c82.124,90.697) v2@81.761,91.061 ; 81.61,90.697 cw(c82.124,90.697) v2@81.761,91.061 ; v2@88.013,82.066 ccw(c87.649,82.429) 88.163,82.429 ; v2@88.013,82.066 ccw(c87.649,82.429) 88.163,82.429 ; v2@88.013,82.066 ccw(c87.649,82.429) 88.163,82.429 ; 88.163,82.429 ccw(c88.678,82.429) v2@88.314,82.066 ; 88.163,82.429 ccw(c88.678,82.429) v2@88.314,82.066 ; 88.163,82.429 ccw(c88.678,82.429) v2@88.314,82.066 ; v2@89.455,78.66 ccw(c90.121,79.326) 90.121,78.384 ; v2@89.455,78.66 ccw(c90.121,79.326) 90.121,78.384 ; v2@89.455,78.66 ccw(c90.121,79.326) 90.121,78.384 ; v2@89.464,78.725 cw(c89.649,78.391) 89.84,78.722 ; v2@89.464,78.725 cw(c89.649,78.391) 89.84,78.722 ; v2@89.464,78.725 cw(c89.649,78.391) 89.84,78.722 ; v2@89.539,78.483 cw(c89.637,78.117) 89.827,78.446 ; v2@89.539,78.483 cw(c89.637,78.117) 89.827,78.446 ; v2@89.539,78.483 cw(c89.637,78.117) 89.827,78.446 ; v2@89.587,78.503 cw(c89.903,77.932) 90.229,78.497 ; v2@89.587,78.503 cw(c89.903,77.932) 90.229,78.497 ; v2@89.587,78.503 cw(c89.903,77.932) 90.229,78.497 ; v2@89.635,78.84 ccw(c90.734,79.939) 90.734,78.384 ; v2@89.635,78.84 ccw(c90.734,79.939) 90.734,78.384 ; v2@89.635,78.84 ccw(c90.734,79.939) 90.734,78.384 ; v2@89.696,78.713 ccw(c90.101,78.758) 89.897,78.405 ; v2@89.696,78.713 ccw(c90.101,78.758) 89.897,78.405 ; v2@89.696,78.713 ccw(c90.101,78.758) 89.897,78.405 ; 91.46,78.384 ccw(c91.46,79.939) v2@92.559,78.84 ; 91.46,78.384 ccw(c91.46,79.939) v2@92.559,78.84 ; 91.46,78.384 ccw(c91.46,79.939) v2@92.559,78.84 ; 91.965,78.497 cw(c92.291,77.932) v2@92.607,78.503 ; 91.965,78.497 cw(c92.291,77.932) v2@92.607,78.503 ; 91.965,78.497 cw(c92.291,77.932) v2@92.607,78.503 ; 92.073,78.384 ccw(c92.073,79.326) v2@92.739,78.66 ; 92.073,78.384 ccw(c92.073,79.326) v2@92.739,78.66 ; 92.073,78.384 ccw(c92.073,79.326) v2@92.739,78.66 ; 92.297,78.405 ccw(c92.093,78.758) v2@92.498,78.713 ; 92.297,78.405 ccw(c92.093,78.758) v2@92.498,78.713 ; 92.297,78.405 ccw(c92.093,78.758) v2@92.498,78.713 ; 92.355,78.722 cw(c92.545,78.391) v2@92.73,78.725 ; 92.355,78.722 cw(c92.545,78.391) v2@92.73,78.725 ; 92.355,78.722 cw(c92.545,78.391) v2@92.73,78.725 ; 92.367,78.446 cw(c92.557,78.117) v2@92.655,78.483 ; 92.367,78.446 cw(c92.557,78.117) v2@92.655,78.483 ; 92.367,78.446 cw(c92.557,78.117) v2@92.655,78.483
GND: BC1.1 BC2.1 BH1.2 BH2.1 BT.2 C0.2 C1.1 C1_2.1 C2.1 C3.1 C4.2 C5.1 C6.1 C7.1 C8.1 C9.1 C10.2 C11.2 C12.2 C13.2 C14.2 C16.1 C17.2 C18.1 C20.1 CMZ.2 DM.1 pad.0@87.6,65.432 pad.0@89.408,100.355 pad.0@96.33,100.032 pad.0@116.6,112.932 pad.0@116.6,116.032 pad.4@83.82,97.511 Q2.2 R8.2 R12.1 R16.2 R20.1 SPI1.7 SPI2.8 TY2.2 TY3.2 TY.2 U1.7 U2.3 U3.1 U4.2 WRC.2 | length 4662.6
  Top Layer w0.254: C0.2@126.695,84.557 126.84,84.549 C0.2@126.913,84.546
  Top Layer w0.495: U1.7@99.825,87.877 104.006,87.877 C4.2@104.523,88.724 ; C4.2@104.419,88.951 C4.2@104.65,88.951 ; C0.2@126.913,84.546 126.924,84.328 C0.2@126.924,84.633 ; 104.066,87.975 ccw(c103.169,88.523) C4.2@104.162,88.868 ; 104.066,87.975 ccw(c103.169,88.523) C4.2@104.162,88.868 ; 104.066,87.975 ccw(c103.169,88.523) C4.2@104.162,88.868